# Altium PCB BELL.PcbDoc
Units mm, origin at the board's own origin, x right, y up, seen from the top; angles counter-clockwise.
Board outline 67.5 x 29.5 mm, 2 copper layers (Top Layer, Bottom Layer), stack 1.671 mm thick; 12 components, 10 nets, 36 pads, 3 vias.
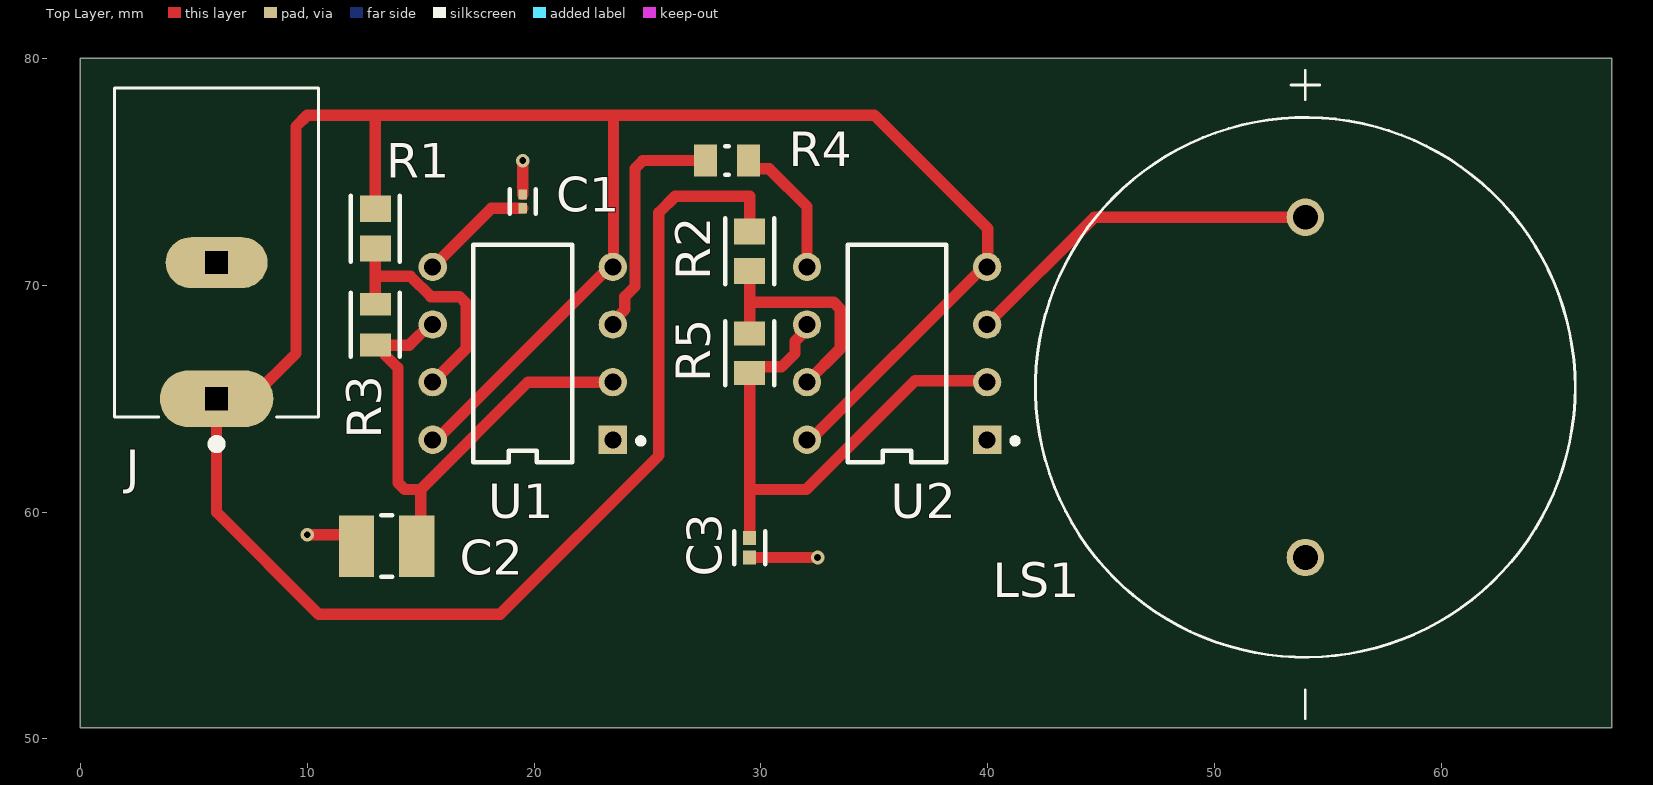
[diagram p0: Top Layer view]
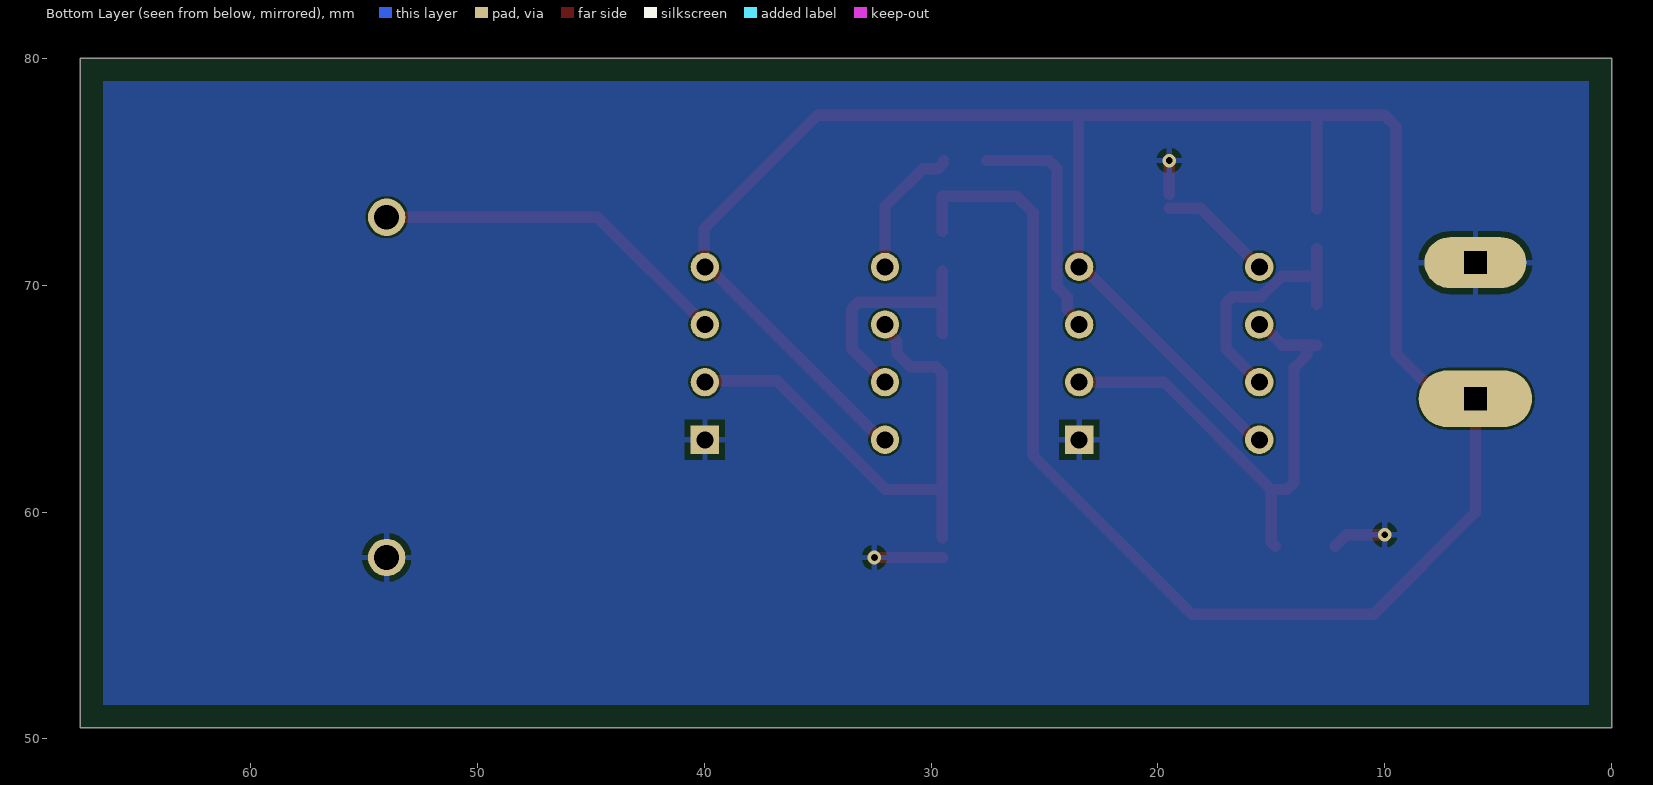
[diagram p1: Bottom Layer view, seen from below]
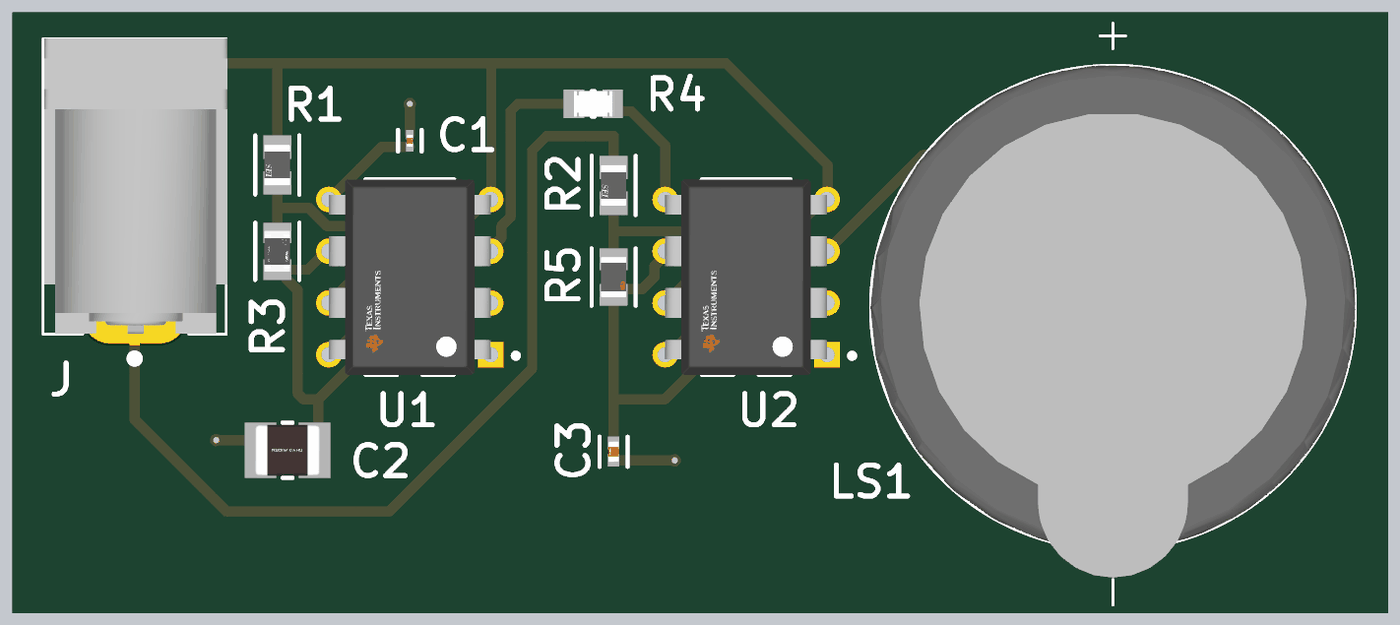
[diagram p2: 3D render of the assembled board from above, using the file's embedded part models]

## Layer stack, top to bottom
Top Solder: solder mask 0.0102, Solder Resist, Dk 3.5
Top Layer: signal copper 0.0356
Dielectric 1: dielectric 1.6, FR-4, Dk 4.8
Bottom Layer: signal copper 0.0356
Bottom Solder: solder mask 0.0102, Solder Resist, Dk 3.5

## Board outline
0,80 67.5,80 67.5,50.5 0,50.5

## Design rules (kind name [scope] priority, off if disabled: settings)
Clearance [All] p1: gap=0.1 ignorepadtopadclearanceinfootprint=FALSE
HoleSize [All] p1: absolutevalues=TRUE maxlimit=4 minlimit=0.025 maxpercent=80.000 minpercent=20.000
MinimumSolderMaskSliver [All] p1: minsoldermaskwidth=0.1
PolygonConnect [All] p1: connectstyle=Relief reliefconductorwidth=0.254 reliefentries=4 polygonreliefangle="90 Angle" airgapwidth=0.254
RoutingVias [All] p1: holewidth=0.3 width=0.6 viastyle="Through Hole" minholewidth=0.3 minwidth=0.6 maxholewidth=0.3 maxwidth=0.6
SilkToSolderMaskClearance [IsPad] p1: minsilkscreentomaskgap=0.1 clearancetoexposedcopper=TRUE
SolderMaskExpansion [All] p1: expansion=0.102 istentingtop=FALSE
Width [All] p1: maxlimit=1 minlimit=0.3 preferedwidth=0.5
27 further rules are at their usual default settings.

## Components (designator, comment, footprint, x,y, rotation, side; value= is the part's Value field where it differs from the comment)
C1 "0.012uF" FP-GRM033-0_03-IPC_B 19.5,73.696 r90 top
C2 "47uF" FP-MK325M-IPC_B 13.5,58.5 r180 top
C3 "0.1uF" FP-CL46-IPC_B 29.5,58.429 r270 top
J "PJ-037B" CUI_PJ-037B 6,65 r90 top
LS1 "AI-2429-TWT-R" XDCR_AI-2429-TWT-R 54,65.5 r270 top
R1 "2,2k" FP-RMCF0805-IPC_B 13,72.5 r270 top
R2 "2,2k" FP-RMCF0805-IPC_B 29.5,71.5 r270 top
R3 "24,9k" FP-RT0805-IPC_B 13,68.263 r270 top value=24.9KΩ
R4 "100k" FP-CRCW0805-e3-IPC_B 28.5,75.5 r0 top
R5 "39k" FP-KTR10-IPC_B 29.5,67 r270 top
U1 "LM555CN/NOPB" FP-P0008A-MFG 19.5,67 r180 top
U2 "LM555CN/NOPB" FP-P0008A-MFG 36,67 r180 top

## Footprints (in the part's own frame and the unit in brackets; to place one, negate y for a bottom-side part, rotate by r counter-clockwise, add the part's x,y. Pads: shape width x height; smd on the part's side, far side on the other; paste and mask are expansions set on the pad)
CUI_PJ-037B [mm] "Vcc"
  oval 2.5x5 hole 1 square: 1(0,0)
  oval 2.25x4.5 hole 1 square: 2(6,0)
  silkscreen extent -2.2,-4.5 13.7,4.5, body extent -0.77,-4.55 13.73,4.45, height 10.51
FP-CL46-IPC_B [mm] "0.1uF"
  rect 0.615x0.572 smd paste+0 mask+0: 1(-0.429,0) 2(0.429,0)
  silkscreen extent -0.74,-0.69 0.74,0.69, body extent -0.89,-0.44 0.89,0.44, height 0.25
FP-CRCW0805-e3-IPC_B [mm] "100k"
  rect 1.007x1.408 smd paste+0 mask+0: 1(-0.951,0) 2(0.951,0)
  silkscreen extent -0.07,-0.63 0.07,0.63, body extent -1.7,-0.95 1.7,0.95, height 0.25
FP-GRM033-0_03-IPC_B [mm] "0.012u"
  rect 0.454x0.363 smd paste+0 mask+0: 1(-0.304,0) 2(0.304,0)
  silkscreen extent -0.53,-0.58 0.53,0.58, body extent -0.68,-0.33 0.68,0.33, height 0.25
FP-KTR10-IPC_B [mm] "39k"
  rect 1.058x1.362 smd paste+0 mask+0: 1(-0.877,0) 2(0.877,0)
  silkscreen extent -1.41,-1.08 1.41,1.08, body extent -1.66,-0.93 1.66,0.93, height 0.25
FP-MK325M-IPC_B [mm] "47uF"
  rect 1.553x2.706 smd paste+0 mask+0: 1(-1.325,0) 2(1.325,0)
  silkscreen extent -0.25,-1.35 0.25,1.35, body extent -2.35,-1.6 2.35,1.6, height 0.25
FP-P0008A-MFG [mm]
  rect 1.25x1.25 hole 0.75 paste-1000 mask+0: 1(-3.97,3.81)
  round 1.25 hole 0.75 paste-1000 mask+0: 2(-3.97,1.27) 3(-3.97,-1.27) 4(-3.97,-3.81) 5(3.97,-3.81) 6(3.97,-1.27) 7(3.97,1.27) 8(3.97,3.81)
  silkscreen extent -5.33,-4.79 2.17,4.79, body extent -4.69,-5.18 4.69,5.18, height 0.25
FP-RMCF0805-IPC_B [mm] "2,2k"
  rect 1.155x1.362 smd paste+0 mask+0: 1(-0.876,0) 2(0.876,0)
  silkscreen extent -1.45,-1.08 1.45,1.08, body extent -1.7,-0.93 1.7,0.93, height 0.25
FP-RT0805-IPC_B [mm] "24,9"
  rect 1.008x1.362 smd paste+0 mask+0: 1(-0.902,0) 2(0.902,0)
  silkscreen extent -1.41,-1.08 1.41,1.08, body extent -1.66,-0.93 1.66,0.93, height 0.25
XDCR_AI-2429-TWT-R [mm] "buzz"
  round 1.65 hole 1.1: N(7.5,0) P(-7.5,0)
  silkscreen extent -13.97,-11.9 14.61,11.9, body extent -11.9,-11.9 13.25,11.9, height 16.01

## Part data
C1: library part CMP-2010-01245-2, "Chip Multilayer Ceramic Capacitors for General Purpose, 0201, 12000pF, X6S, 22%, 10%, 6.3V", Capacitance=12nF, Case Code (Imperial)=0201, Case Code (Metric)=0603, Dielectric=X6S, Max Operating Temperature=105°C, Min Operating Temperature=-55°C, Package Quantity=15000, Supplier Part Number 1=399-C0805C123K5RAC7800CT-ND, Tolerance=10%, Voltage Rating=6.3V, Case/Package=0201, Category="Ceramic Capacitors", Depth=0.3mm, Height=0.3mm, Length=0.6mm, Mount="Surface Mount", Packaging="Tape and Reel", Radiation Hardening=No, Supplier 1=Digi-Key, Termination=SMD/SMT, Thickness=0.013inch, Voltage Rating (DC)=6.3V, Width=0.3mm
C2: library part CMP-2000-06559-2, "CAP CER 47UF 10V X7R 1210", Case Code (Imperial)=1210, Case Code (Metric)=3225, Dielectric=X7R, Max Operating Temperature=125°C, Min Operating Temperature=-55°C, Package Quantity=500, Resistor Type=Ceramic, Supplier Part Number 1=399-15638-1-ND, Tolerance=20%, Voltage=10V, Capacitance=47uF, Case/Package=1210, Category="Ceramic Capacitors", Construction=Flat, Depth=2.5mm, Halogen Free="Halogen Free", Height=2.5mm, Lead Free="Lead Free", Length=3.2mm, Mount="Surface Mount", Number of Pins=2, Packaging="Tape and Reel", Radiation Hardening=No, RoHS Compliant=Yes, Series=M, Supplier 1=Digi-Key, Termination=SMD/SMT, Thickness=0.106inch, Voltage Rating=10V, Voltage Rating (DC)=10V, Width=2.5mm
C3: library part CMP-13271-002143-1, "Cap Ceramic 100nF 10V X5R ±10% SMD 0402 +85°C Paper T/R", Capacitance=100nF, Case Code (Imperial)=0402, Case Code (Metric)=1005, Dielectric=X5R, Max Operating Temperature=85°C, Min Operating Temperature=-55°C, Supplier Part Number 1=490-3261-1-ND, Tolerance=10%, Voltage Rating=10V, Case/Package=0402, Category="Ceramic Capacitors", Contact Plating=Tin, Depth=0.5mm, Height=0.5mm, Length=1mm, Mount="Surface Mount", Packaging="Tape and Reel", Radiation Hardening=No, Supplier 1=Digi-Key, Thickness=0.022inch, Width=0.02inch
J: "2.5 x 6.5 mm, 2.5 A, Horizontal, Through Hole, Dc Power Jack Connector", Color=Black, Current Rating=2.5A, Flammability Rating="UL94 V-0", Insulation Resistance=100MR, Manufacturer=CUI, Max Operating Temperature=85°C, Min Operating Temperature=-25°C, Package=None, Package Quantity=500, Supplier Part Number 1=CP-037BH-ND, Voltage Rating=24V, Availability=Unavailable, Category=Connectors, ComponentLink1Description=http://www.mouser.com/ds/2/670/pj-037b-515963.pdf?src-supplier=Mouser, ComponentLink1URL=http://www.mouser.com/ds/2/670/pj-037b-515963.pdf?src-supplier=Mouser, ComponentLink2Description=https://www.cui.com/product/resource/digikeypdf/pj-037b.pdf?src-supplier=Digi-Key, ComponentLink2URL=https://www.cui.com/product/resource/digikeypdf/pj-037b.pdf?src-supplier=Digi-Key, Connector Type=Jack, Contact Gender=Male, Contact Material=Copper, Contact Plating=Nickel, CUI_purchase_URL=https://www.cuidevices.com/product/interconnect/connectors/dc-power-connectors/jacks/pj-037b?utm_source=snapeda.com&utm_medium=referral&utm_campaign=snapedaBOM, Gender=Male, Housing Color=Black, Housing Material=Thermoplastic, Lead Free="Lead Free", Manufacturer Part Number=PJ-037B, MF="CUI Devices", Mount="Through Hole", MP=PJ-037B, Number of Conductors=2, Orientation=Horizontal, Packaging=Bulk, Price=None, RoHS=Yes, RoHS Compliant=Yes, Series=-, Shielding=Unshielded, SnapEDA_Link=https://www.snapeda.com/parts/PJ-037B/CUI%20Devices/view-part/493700/?ref=snap, Supplier 1=Digi-Key, Supplier 2=Digi-Key, Supplier Part Number 2=CP-037B-ND, Termination=Solder
LS1: "AUDIO INDICATOR 12VDC 8 MA 100DBA 2900HZ", Package="PUI Audio", Supplier Part Number 1=668-1028-ND, Availability="In Stock", Category="Audio Products", Check_prices=https://www.snapeda.com/parts/AI-2429-TWT-R/PUI%20Audio/view-part/439756/?ref=eda, MF="PUI Audio", MP=AI-2429-TWT-R, Price=None, Purchase-URL=https://pricing.snapeda.com/search/part/AI-2429-TWT-R/?ref=eda, qwer=qweqw, SnapEDA_Link=https://www.snapeda.com/parts/AI-2429-TWT-R/PUI%20Audio/view-part/439756/?ref=snap, Supplier 1=Digi-Key
R1 R2: library part CMP-26527-000414-1, "2.2kΩ ±1% 0.125W 0805 Thick Film Chip Resistor AEC-Q200 compliant", Case/Package=0805, Max Operating Temperature=155°C, Max Power Dissipation=125mW, Min Operating Temperature=-55°C, Package Quantity=10000, Resistance=2.2kR, Resistor Type="Thick Film", Supplier Part Number 1=P2.0KDBCT-ND, Temperature Coefficient=100ppm/°C, Tolerance=1%, Category="Chip Resistor - Surface Mount", Contact Plating=Tin, Features="Automotive AEC-Q200", Height=0.026inch, Length=0.079inch, Mount="Surface Mount", Number of Terminations=2, Packaging="Tape and Reel", Radiation Hardening=No, RoHS Compliant=Yes, Series=RMCF, Supplier 1=Digi-Key, Width=0.049inch
R3: library part CMP-03412-011084-1, "RES SMD 24.9K OHM 0.1% 1/8W 0805", Manufacturer=Yageo, Manufacturer Part Number=RT0805BRD0724K9L, Package=RT0805, Power Rating=0.125W, Resistance=24.9KΩ, Supplier Part Number 1=YAG1842CT-ND, Temperature="-55°C to +155°C", Temperature Coefficient="25 ppm/°C", Temperature Range High=+155°C, Temperature Range Low=-55°C, Tolerance=0.0025, Voltage Rating=150V, Automotive=No, Category="Chip Resistor - Surface Mount", ComponentLink2Description=Datasheet, ComponentLink2URL=http://www.yageo.com/documents/recent/PYu-RT_1-to-0.01_RoHS_L_9.pdf, Composition="Thin Film", Device Class L1="Passive Components", Device Class L2=Resistors, Device Class L3="Chip SMD Resistors", Digikey Description="RES SMD 24.9K OHM 0.1% 1/8W 0805", Footprint Url=http://www.yageo.com/exep/pages/download/literatures/PYu-R_Mount_10.pdf, Height=0.6mm, Ipc Land Pattern Name=RESC200125X50, Lead Free=Yes, Mouser Description="Res Thin Film 0805 24.9K Ohm 0.1% 1/8W ±25ppm/°C Molded SMD SMD Paper T/R", Octopart=https://octopart.com/rt0805brd0724k9l-yageo-1279812, RoHS=TRUE, Series=RT, Supplier 1=Digi-Key
R4: library part CMP-2001-04187-2, "RES Thick Film, 100kΩ, 1%, 0.125W, 100ppm/°C, 0805", Case Code (Imperial)=0805, Case Code (Metric)=2012, Max Operating Temperature=155°C, Max Power Dissipation=125mW, Min Operating Temperature=-55°C, Package Quantity=10000, Resistance=100kR, Supplier Part Number 1=P100KLCT-ND, Temperature Coefficient=100ppm/°C, Tolerance=1%, Voltage Rating=150V, Case/Package=0805, Category="Chip Resistor - Surface Mount", Composition="Thick Film", Contact Plating=Tin, Depth=1.25mm, Features="Automotive AEC-Q200", Height=0.02inch, Lead Free="Lead Free", Length=2mm, Military Standard=Not, Number of Pins=2, Number of Terminations=2, Packaging="Tape and Reel", Power Rating=125mW, Radiation Hardening=No, Supplier 1=Digi-Key, Voltage Rating (DC)=150V, Weight=0.000194oz, Width=0.049inch
R5: library part CMP-08839-006009-1, "Res Thick Film 0805 39kΩ 1% 0.125W ±100ppm/°C Automotive Paper T/R", Case Code (Imperial)=0805, Case Code (Metric)=2012, Max Operating Temperature=155°C, Max Power Dissipation=125mW, Min Operating Temperature=-55°C, Package Quantity=5000, Resistance=39kR, Resistor Type="Thick Film", Supplier Part Number 1=P39KDBCT-ND, Temperature Coefficient=100ppm/°C, Tolerance=1%, Case/Package=0805, Category="Chip Resistor - Surface Mount", Features="Automotive AEC-Q200", Height=0.026inch, Length=0.079inch, Number of Terminations=2, Packaging="Tape and Reel", RoHS Compliant=Yes, Series=KTR, Supplier 1=Digi-Key, Width=0.049inch
U1 U2: library part CMP-0056-00016-4, "IC OSC SINGLE TIMER 100KHZ 8-DIP", Ambient Temperature Range High=+70°C, Ambient Temperature Range Low=0°C, Manufacturer="Texas Instruments", Max Supply Voltage=16V, Min Supply Voltage=4.5V, Nominal Supply Current=3mA, Package=P0008A, Supplier Part Number 1=LM555CNNS/NOPB-ND, Temperature="0°C to +70°C", Automotive=No, Category=IC, ComponentLink2Description=Datasheet, ComponentLink2URL=http://www.ti.com/lit/ds/symlink/lm555.pdf, Device Class L1="Integrated Circuits (ICs)", Device Class L2="Clock and Timing", Device Class L3="Timers and Oscillators", Digikey Description="IC OSC SINGLE TIMER 100KHZ 8-DIP", Height=5.08mm, Lead Free=Yes, Manufacturer Part Number=LM555CN/NOPB, Max Junction Temp=+70°C, Number Of Timers/Counters=1, Octopart=https://octopart.com/lm555cn%2Fnopb-texas+instruments-24814897, RoHS=TRUE, Standoff Height=0.51mm, Supplier 1=Digi-Key, Temperature Range High=+70°C, Temperature Range Low=0°C

## Via types
v1: diameter 0.6, hole 0.3, Top Layer to Bottom Layer, tented both sides, 3 vias

## Nets (pads, with @x,y where several pads share a name; then routed paths per layer and width w, separated by ;. In a path a pad name is that pad's centre, name@x,y a point inside that pad or via, vN(x,y) a via of type N, cw(c..) or ccw(c..) an arc to the next point about the centre after c; other vN are vias at no path point)
GND: C1.2 C2.2 C3.2 J.2 LS1.N U1.1 U2.1 | length 6.9
  Top Layer w0.5: v1(10,59) 11.675,59 C2.2 ; C1.2 v1(19.5,75.5) ; C3.2 v1(32.5,58)
NetC1_1: C1.1 U1.5 | length 5.1
  Top Layer w0.5: U1.5@15.5,70.84 U1.5 18.111,73.391 C1.1
NetC2_1: C2.1 R3.2 U1.2 U1.6 | length 23.6
  Top Layer w0.5: C2.1 15,58.675 15,61 ; U1.6 15.403,68.27 14.494,67.361 R3.2 13.177,67.361 13.431,67.107 13.431,66.93 14,66.361 14,61.293 14.293,61 15,61 ; U1.2 19.73,65.73 15,61
NetC3_1: C3.1 R5.2 U2.2 U2.6 | length 23.6
  Top Layer w0.5: C3.1 29.5,61 ; U2.6 32.03,68.067 31.5,67.537 31.5,67 30.902,66.402 29.779,66.402 R5.2 29.5,61 ; U2.2 39.907,65.793 36.793,65.793 32,61 29.5,61
NetJ_1: J.1 R1.1 R2.1 U1.4 U1.8 U2.4 U2.8 | length 127.6
  Top Layer w0.5: R1.1 13,77.5 ; U1.8 15.69,63.19 23.31,70.81 U1.4 23.5,70.84 23.5,77.5 ; R2.1 29.5,73.927 26.22,73.927 25.5,73.207 25.5,62.5 18.5,55.5 10.5,55.5 6,60 J.1 7.5,65 9.5,67 9.5,77 10,77.5 13,77.5 ; U2.8 32.19,63.19 39.81,70.81 U2.4 40,70.84 40,72.5 35,77.5 23.5,77.5 ; 13,77.5 23.5,77.5
NetLS1_P: LS1.P U2.3 | length 16
  Top Layer w0.5: U2.3 44.7,73 LS1.P
NetR1_2: R1.2 R3.1 U1.7 | length 11
  Top Layer w0.5: R3.1 13,70.395 ; R1.2 13,70.395 ; U1.7 17,67.2 17,69.207 16.707,69.5 15.447,69.5 14.553,70.395 13,70.395
NetR2_2: R2.2 R5.1 U2.7 | length 10.7
  Top Layer w0.5: R5.1 29.5,69.251 ; R2.2 29.5,69.251 ; U2.7 33.5,67.2 33.5,68.958 33.207,69.251 29.5,69.251
NetR4_1: R4.1 U1.3 | length 10.5
  Top Layer w0.5: U1.3 23.47,68.408 24,68.938 24,69.5 24.445,69.945 24.445,75.152 24.793,75.5 R4.1
NetR4_2: R4.2 U2.5 | length 6.1
  Top Layer w0.5: R4.2 29.451,75.394 29.704,75.141 30.359,75.141 32.03,73.47 U2.5

## Polygon pours and split planes (outlines as drawn)
GND on Bottom Layer "GND_L02_P000" (solid, pour order 0): 1,51.5 66.5,51.5 66.5,79 1,79

## Silkscreen, mask and mechanical layers (free items; w line width, h text height)
Board Outline:
  the board outline again, w0.1